# EAGLE board Placa brd actualizada eze; (EAGLE 7.6.0)
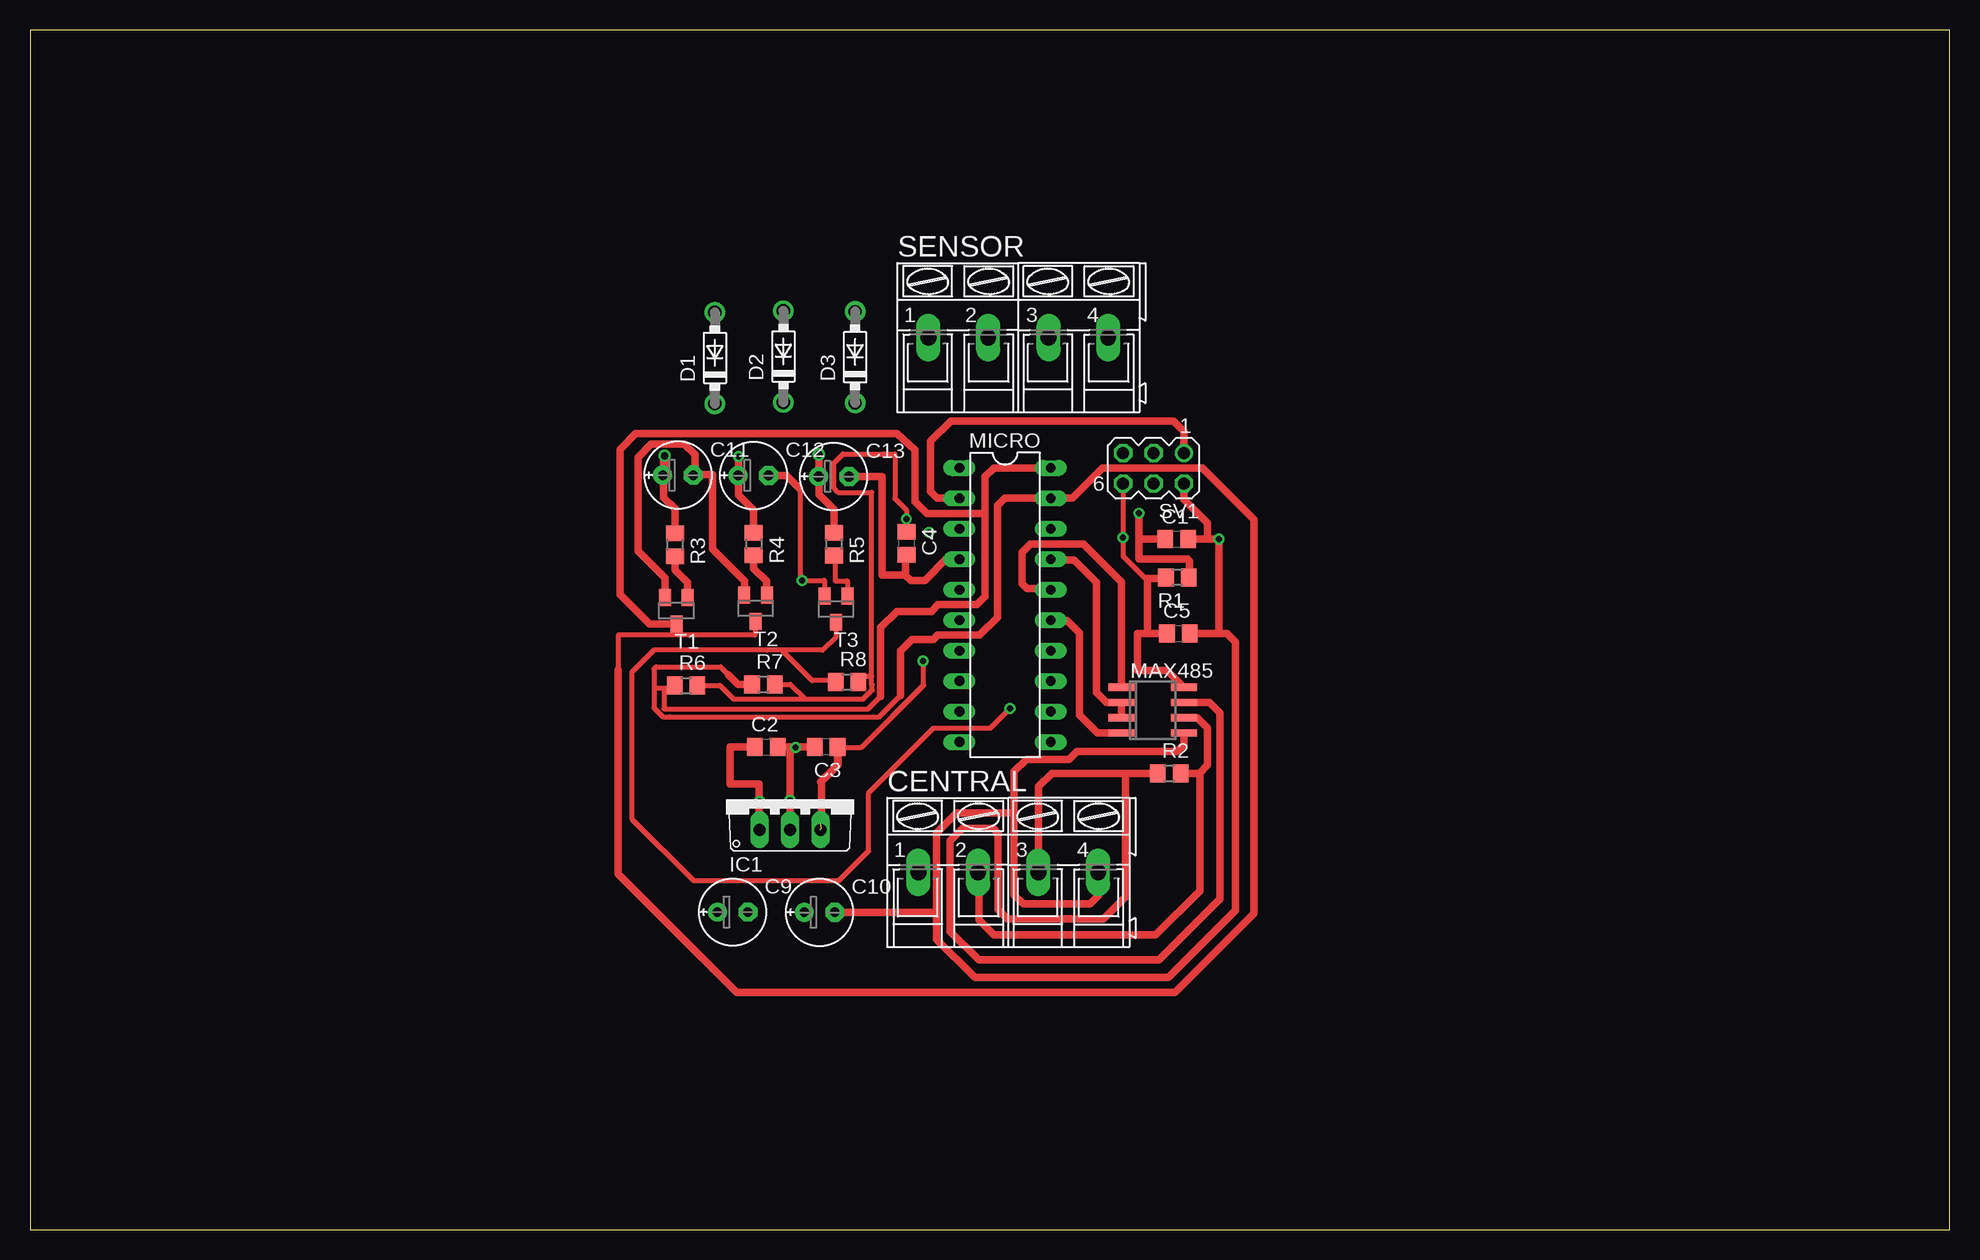
[diagram p0: board, top side]
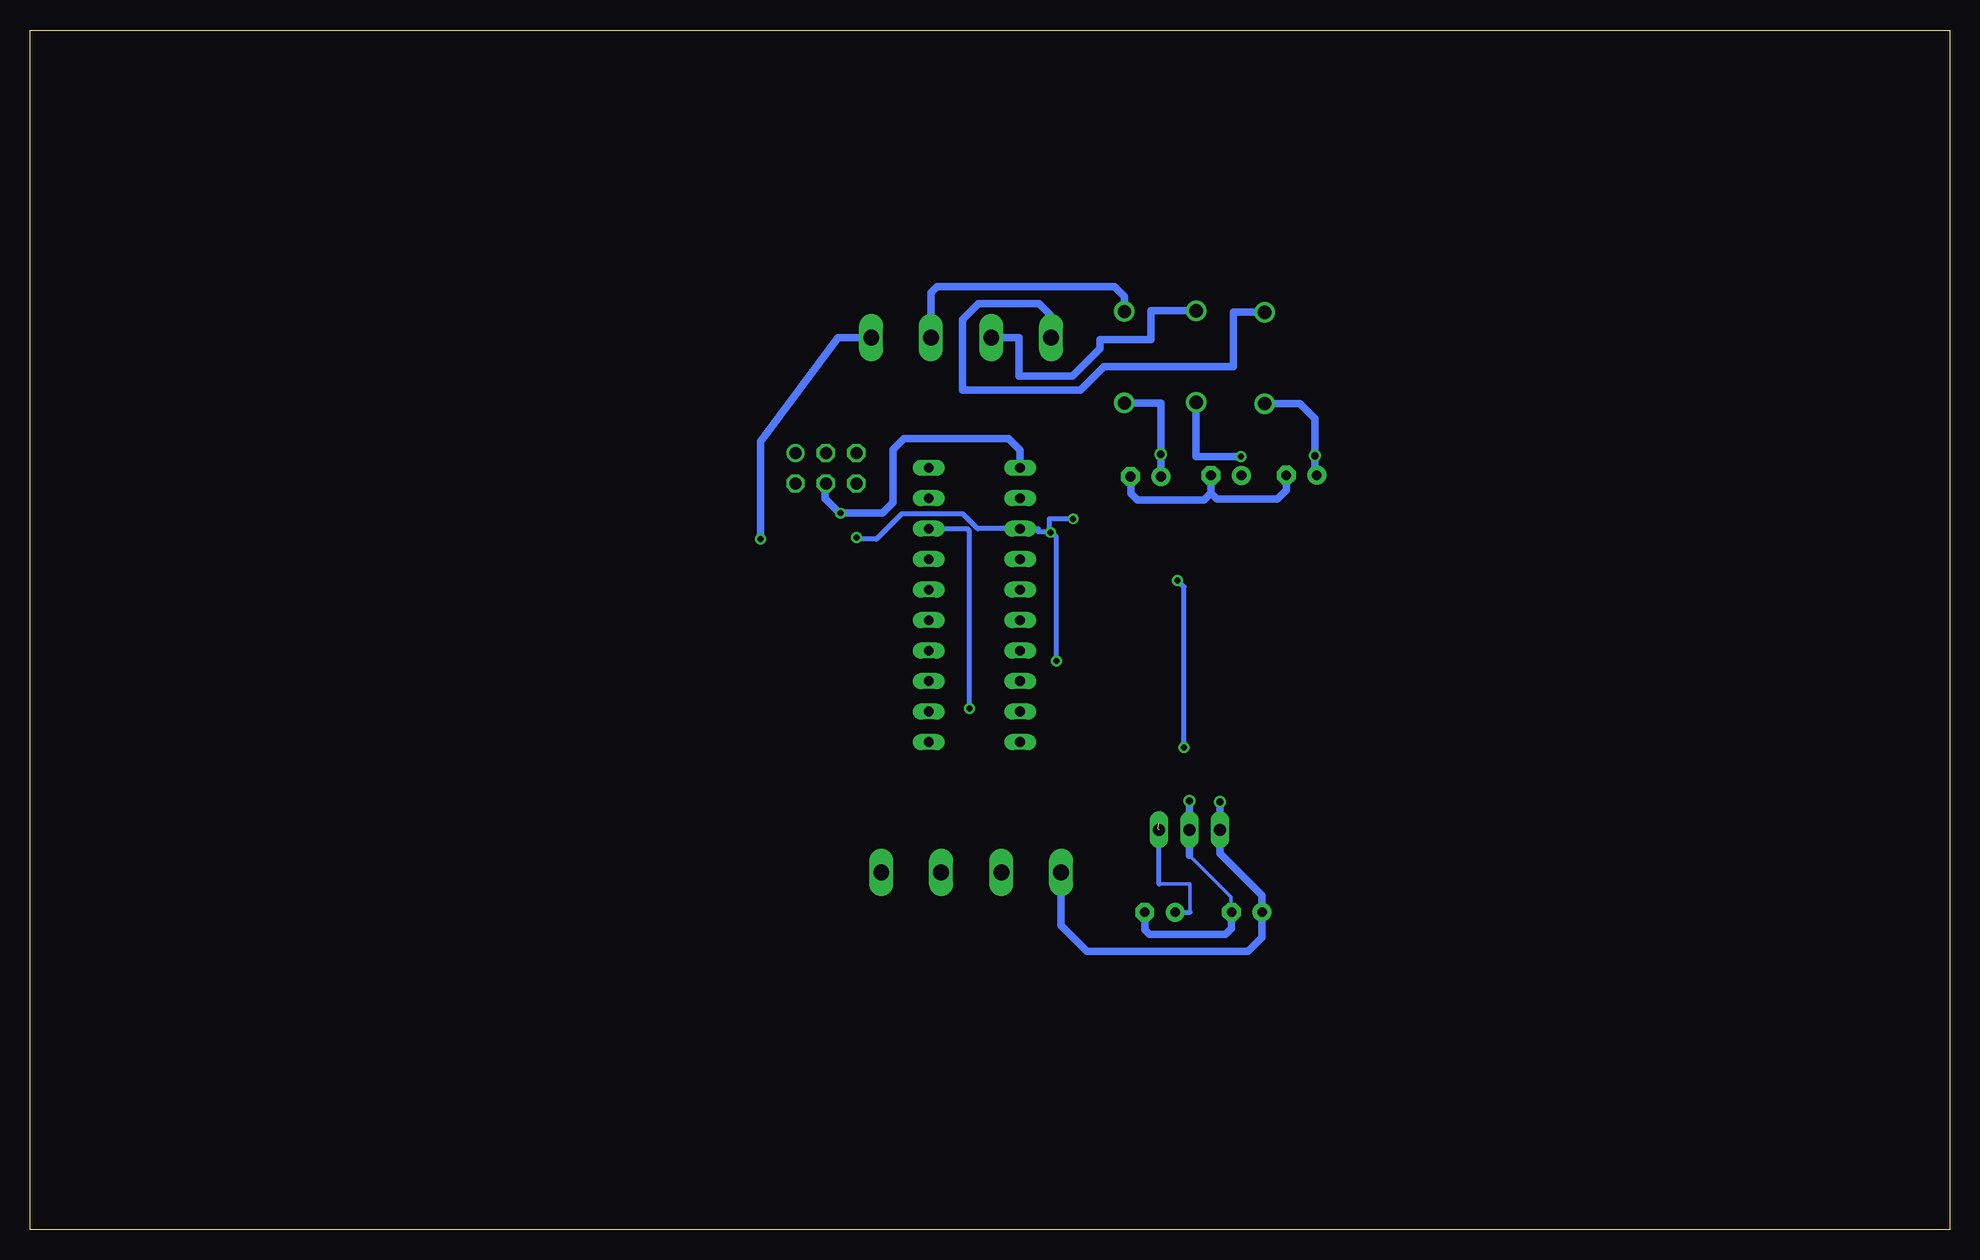
[diagram p1: board, bottom side, seen from below]

Size 160 x 100 mm. Coordinates in mm from the lower left corner, seen from the top.
Outline: 0,0 160,0 160,100 0,100 0,0
Copper layers (1*16): Top 0.035mm / dielectric 1.5mm / Bottom 0.035mm
Design rules "default": minimum track width 10mil, minimum drill 24mil, track to track 8mil, track to pad 8mil, pad to pad 8mil, via to via 8mil, smd to smd 8mil, copper to edge 40mil, drill to drill 8mil, minimum pad ring 10mil, minimum via ring 8mil, stop-mask expansion 4mil, vias tented up to drill 0mil, thermal gap 10mil

## Footprints (pad centres in the part's own frame; a part is rotated, then mirrored left to right if it is on the bottom)
C0805 = smd 1.3 x 1.5: 1 -0.95,0; 2 0.95,0
E2,5-6E = drill 0.813 pad 1.575: + -1.27,0 | drill 0.813 pad 1.575 octagon: - 1.27,0
AK300/4 = drill 1.321 long: 1 -7.493,0; 2 -2.515,0; 3 2.515,0; 4 7.493,0
DO41-7.6 = drill 1.1 pad 1.7: A 3.81,0; C -3.81,0
TO220V = drill 1.016 long: 1 -2.54,-2.54; 2 0,-2.54; 3 2.54,-2.54
SOIC8 = smd 0.6 x 2.2: 1 -1.905,-2.6; 2 -0.635,-2.6; 3 0.635,-2.6; 4 1.905,-2.6; 5 1.905,2.6; 6 0.635,2.6; 7 -0.635,2.6; 8 -1.905,2.6
DIL20 = drill 0.813 long: 1 -11.43,-3.81; 2 -8.89,-3.81; 3 -6.35,-3.81; 4 -3.81,-3.81; 5 -1.27,-3.81; 6 1.27,-3.81; 7 3.81,-3.81; 8 6.35,-3.81; 9 8.89,-3.81; 10 11.43,-3.81; 11 11.43,3.81; 12 8.89,3.81; 13 6.35,3.81; 14 3.81,3.81; 15 1.27,3.81; 16 -1.27,3.81; 17 -3.81,3.81; 18 -6.35,3.81; 19 -8.89,3.81; 20 -11.43,3.81
R0805 = smd 1.3 x 1.5: 1 -0.95,0; 2 0.95,0
MA03-2 = drill 1.016: 1 -2.54,-1.27 | drill 1.016 octagon: 2 -2.54,1.27; 3 0,-1.27; 4 0,1.27; 5 2.54,-1.27; 6 2.54,1.27
SOT23 = smd 1 x 1.4: 1 -0.95,-1.1; 2 0.95,-1.1; 3 0,1.1

## Placement (x,y rotation side)
C1  100nF  [C0805]  95.58,57.55 0 top
C2  100nF  [C0805]  61.38,40.23 0 top
C3  100nF  [C0805]  66.36,40.23 180 top
C4  100n  [C0805]  73.05,57.2 270 top
C5  100n  [C0805]  95.72,49.7 0 top
C9  47uF x 25V  [E2,5-6E]  58.57,26.46 0 top
C10  47uF x 16V  [E2,5-6E]  65.81,26.45 0 top
C11  47uF x 16V  [E2,5-6E]  54.02,62.88 0 top
C12  47uF x 16V  [E2,5-6E]  60.3,62.87 0 top
C13  47uF x 16V  [E2,5-6E]  67,62.77 0 top
CENTRAL  [AK300/4]  81.55,29.77 0 top
D1  1N5819-B  [DO41-7.6]  57.09,72.66 90 top
D2  1N5819-B  [DO41-7.6]  62.8,72.78 90 top
D3  1N5819-B  [DO41-7.6]  68.78,72.72 90 top
IC1  LM2940  [TO220V]  63.35,35.87 0 top
MAX485  LTC485S  [SOIC8]  93.58,43.3 270 top
MICRO  [DIL20]  81.28,52.07 270 top
R1  4,7k-10k  [R0805]  95.64,54.35 180 top
R2  120  [R0805]  94.97,38.04 0 top
R3  100  [R0805]  53.75,57.08 270 top
R4  100  [R0805]  60.33,57.15 270 top
R5  100  [R0805]  67,57.14 270 top
R6  4k7  [R0805]  54.69,45.36 0 top
R7  4k7  [R0805]  61.13,45.45 0 top
R8  4k7  [R0805]  68.1,45.66 0 top
SENSOR  [AK300/4]  82.39,74.36 0 top
SV1  [MA03-2]  93.66,63.47 180 top
T1  BC846  [SOT23]  53.88,51.59 180 top
T2  BC846  [SOT23]  60.48,51.79 180 top
T3  BC846  [SOT23]  67.17,51.72 180 top

## Library data of the parts
C1-C5 R1-R8 = resistor
C9-C13 = rcl
CENTRAL SENSOR = con-ptr500; OC_FARNELL: unknown; OC_NEWARK: unknown
D1-D3 = diode
IC1 = linear
MAX485 = linear-technology; OC_FARNELL: unknown; OC_NEWARK: unknown
MICRO = ic-package
SV1 = con-lstb; OC_FARNELL: unknown; OC_NEWARK: unknown
T1-T3 = transistor

## Nets
BKGD: MICRO.2 SV1.1
CONTROL485: MAX485.2 MAX485.3 MICRO.17
GND: C1.2 C2.2 C3.2 C4.2 C5.2 C9.- C10.- C11.- C12.- C13.- CENTRAL.4 IC1.2 MAX485.5 MICRO.4 SENSOR.4 SV1.2 T1.2 T2.2 T3.2
N$1: C2.1 C9.+ CENTRAL.1 IC1.1
N$2: CENTRAL.2 MAX485.6 R2.2
N$3: CENTRAL.3 MAX485.7 R2.1
N$4: D1.A SENSOR.1
N$5: D2.A SENSOR.2
N$6: D3.A SENSOR.3
N$7: C11.+ D1.C R3.1
N$8: C12.+ D2.C R4.1
N$9: C13.+ D3.C R5.1
N$10: R5.2 T3.1
N$12: R4.2 T2.1
N$14: R3.2 T1.1
RST: C1.1 MICRO.1 R1.1 SV1.4
RXD: MAX485.1 MICRO.16
SENSOR1: MICRO.20 R6.1 T1.3
SENSOR2: MICRO.19 R7.1 T2.3
SENSOR3: MICRO.18 R8.1 T3.3
TXD: MAX485.4 MICRO.15
VCC: C3.1 C4.1 C5.1 C10.+ IC1.3 MAX485.8 MICRO.3 R1.2 R6.2 R7.2 R8.2 SV1.6

## Tracks (layer width: path | path; a pad name or v marks a point on that pad's centre or on a via)
BKGD
  Top 0.61: MICRO.2 75.61,60.96 75.06,61.51 75.06,65.72 76.75,67.41 95.3,67.41 96.19,66.52 96.19,64.75 SV1.1
CONTROL485
  Top 0.61: MAX485.3 MAX485.2 89.72,43.94 88.89,44.76 88.89,53.95 87.03,55.81 85.16,55.81 MICRO.17
GND  (via drill 0.5)
  Top 0.406: 64.13,61.78 64.17,61.78 64.17,54.12 v64.35,54.12 66.22,54.12 T3.2 | C3.2 63.83,40.23 v63.8,40.2
  Top 0.61: MAX485.5 96.19,40.44 95.59,39.85 87.27,39.85 86.61,39.19 83.05,39.19 82.03,38.17 82.03,34.83 | 82.03,34.83 82.03,27.91 82.81,27.14 88.34,27.14 89.05,27.86 89.05,29.76 CENTRAL.4 | C5.2 99.1,49.7 | 99.1,49.7 99.77,49.7 100.47,48.99 100.47,26.59 94.9,21.02 78.75,21.02 75.58,24.2 75.58,26.23 | 75.58,26.23 75.58,33.06 77.25,34.73 81.93,34.73 82.03,34.83 | C13.- 71,62.77 71,54.55 73,54.55 | 72.99,56.31 C4.2 73,56.2 73,54.55 | C10.- 75.36,26.45 75.58,26.23 | IC1.2 63.35,39.2 63.35,40.23 | 64.13,61.78 63.07,62.84 61.59,62.84 C12.- | MICRO.4 76.37,55.88 74.61,54.12 73.42,54.12 73,54.54 73,54.55 | C3.2 63.35,40.23 | 63.35,40.23 C2.2 | T2.2 59.55,52.91 59.55,54.05 56.89,56.71 56.89,62.92 55.33,62.92 C11.- 55.42,63.02 55.42,64.59 54.53,65.48 51.79,65.48 50.67,64.36 50.67,56.58 52.95,54.3 52.95,52.72 T1.2 | C1.2 98.35,57.55 | 99.1,49.7 v99.1,57.55 98.35,57.55 | SV1.2 96.19,60.85 98.15,58.9 98.15,57.76 98.35,57.55
  Bottom 0.305: 59.88,26.5 59.88,27.71 63.35,31.18
  Bottom 0.406: v63.8,40.2 63.8,53.56 v64.35,54.12
  Bottom 0.61: C11.- 55.28,61.66 56.03,60.91 61.05,60.91 61.55,61.4 61.55,62.84 C12.- 61.57,61.4 62.16,60.81 67.67,60.81 68.23,61.37 68.23,62.74 C13.- | 63.31,33.28 IC1.2 63.35,35.77 63.35,31.18 | 59.88,26.51 59.89,26.5 | SENSOR.4 92.64,74.36 99.1,65.7 v99.1,57.55 | C10.- 67.08,24.98 66.7,24.6 60.35,24.6 59.85,25.1 C9.- 59.88,26.5 59.89,26.5 | 59.89,26.5 59.91,26.48
N$1
  Top 0.61: IC1.1 60.78,33.33 60.78,37.16 58.35,37.16 58.35,40.24 C2.1
  Bottom 0.61: 60.77,33.28 IC1.1 60.81,35.8 60.8,35.78 60.8,31.34 57.3,27.84 C9.+ 57.31,26.45 57.31,24.35 58.46,23.2 71.92,23.2 74.05,25.34 CENTRAL.1
N$2
  Top 0.61: R2.2 97.49,38.04 | 97.49,38.04 98.16,38.71 98.16,41.8 97.33,42.63 96.22,42.63 MAX485.6 | CENTRAL.2 79.08,29.71 79.08,25.82 80.36,24.55 93.8,24.55 97.5,28.25 97.5,38.03 97.49,38.04
N$3
  Top 0.61: R2.1 91.46,38.04 | 91.46,38.04 85.18,38.04 84.06,36.92 CENTRAL.3 | MAX485.7 98.33,43.94 99.2,43.06 99.2,27.55 94.12,22.46 79.09,22.46 76.7,24.86 76.7,32.38 77.74,33.42 80.31,33.42 80.7,33.03 80.7,26.68 81.48,25.91 89.48,25.91 91.32,27.74 91.32,37.9 91.46,38.04
N$4
  Bottom 0.61: D1.A 59.7,76.47 59.7,71.95 70.47,71.95 72.42,70 | 72.42,70 82.28,70 82.28,75.84 80.94,77.19 75.89,77.19 74.92,76.22 74.92,74.38 SENSOR.1 | 72.42,70
N$5
  Bottom 0.61: D2.A 66.55,76.58 66.55,74.2 70.81,74.2 70.81,73.44 73.09,71.17 75.39,71.17 75.4,71.15 77.55,71.15 77.55,74.36 SENSOR.2
N$6
  Bottom 0.61: D3.A 68.78,77.78 69.59,78.59 84.4,78.59 84.91,78.08 SENSOR.3
N$7
  Top 0.61: R3.1 53.75,60.1 52.82,61.03 52.82,64.64 52.91,64.72 52.91,63.04 C11.+ 52.77,62.85
  Bottom 0.61: 52.77,62.85 C11.+ 52.91,63.04 52.91,67.6 54.15,68.84 D1.C
N$8  (via drill 0.5)
  Top 0.305: C12.+ 59.03,64.43 v59.05,64.45
  Top 0.61: R4.1 60.33,59.97 59.05,61.25 v59.05,64.45
  Bottom 0.61: v59.05,64.45 62.8,64.45 D2.C
N$9
  Top 0.61: R5.1 67,60.02 65.75,61.27 65.75,64.67 65.79,64.7 65.79,62.84 C13.+ 65.75,62.74
  Bottom 0.61: C13.+ 65.73,68.91 D3.C
N$10
  Top 0.406: R5.2 67.11,56.19 67.11,54.07 68.12,54.07 T3.1
N$11  (via drill 0.6)
  other vias: 65.75,64.62
N$12
  Top 0.61: R4.2 60.33,55.12 61.38,54.06 61.38,52.94 T2.1
N$14
  Top 0.61: R3.2 53.75,54.99 54.82,53.92 T1.1
N$15  (via drill 0.6)
  other vias: 52.88,64.5
N$16  (via drill 0.6)
  other vias: 60.82,35.65
N$17  (via drill 0.6)
  other vias: 63.36,35.74
N$19  (via drill 0.5)
  other vias: 74.94,58.12
RST  (via drill 0.5)
  Top 0.61: R1.1 96.63,54.4 96.63,55.73 96.47,55.89 92.45,55.89 92.45,57.7 | 92.45,57.7 v92.45,59.71 | C1.1 92.59,57.55 92.45,57.7
  Bottom 0.61: MICRO.1 77.47,64.98 78.44,65.95 87.16,65.95 88.08,65.04 88.08,60.59 88.95,59.71 v92.45,59.71 92.52,59.71 93.75,60.95 93.75,62.1 SV1.4
RXD
  Top 0.61: MAX485.1 90.98,53.99 87.81,57.16 83.38,57.16 82.67,56.45 82.67,53.87 83.11,53.42 85,53.42 MICRO.16
SENSOR1
  Top 0.406: 52.85,45.15 53.52,45.15 R6.1 | 70.9,44.45 69.88,43.43 69.88,43.4 52.85,43.4 52.85,45.15 | 52.05,45.15 52.85,45.15
  Top 0.61: MICRO.20 80.36,63.5 79.62,62.76 79.62,59.69 | 79.62,59.69 79.62,52.76 78.94,52.09 75.69,52.09 75.14,51.53 72.27,51.53 70.9,50.17 70.9,44.45 | 53.77,45.33 R6.1 | T1.3 51.63,50.49 49.17,52.95 49.17,65.03 50.49,66.36 72.26,66.36 73.79,64.97 73.79,60.67 74.76,59.7 79.6,59.7 79.62,59.69
SENSOR2
  Top 0.406: 49.03,46.66 49.03,49.55 60.4,49.55 60.48,49.67 T2.3 | 72.56,44.52 70.78,42.75 53.35,42.75 52.8,42.75 52.75,42.75 52,43.5 52,46.72 52.19,46.91 57.58,46.91 58.24,46.24
  Top 0.61: 72.56,44.52 72.56,48.25 73.51,49.2 75.31,49.2 75.64,49.55 79.16,49.55 80.64,51.02 80.64,60.34 81.25,60.96 MICRO.19 85.11,60.98 86.9,60.98 89.42,63.49 97.73,63.49 102.02,59.2 102.02,26.38 95.42,19.78 58.91,19.78 49.03,29.66 49.03,46.66 | 60.24,45.51 R7.1 59.03,45.45 58.24,46.24
SENSOR3  (via drill 0.5)
  Top 0.406: 67.25,45.76 65.19,45.76 62.65,48.3 | 62.65,48.3 61.45,48.3 52,48.3 50.15,46.45 50.15,34.25 55.3,29.1 67.45,29.1 69.9,31.55 69.9,36.4 75.3,41.8 80.05,41.8 v81.7,43.45 | T3.3 67.17,49.38 66.1,48.3 62.65,48.3
  Top 0.61: 67.25,45.76 R8.1
  Bottom 0.406: v81.7,43.45 81.7,58.25 81.85,58.4 85.09,58.4 MICRO.18
TXD
  Top 0.61: MAX485.4 89,41.4 87.5,42.9 87.5,49.71 86.44,50.77 85.12,50.77 MICRO.15
VCC  (via drill 0.5)  (2 unrouted)
  Top 0.406: 67.34,40.2 69.3,40.2 | 69.3,40.2 74.42,45.32 | R6.2 57.51,45.36 58.66,44.21 64.63,44.21 | 64.63,44.21 69.44,44.21 70.19,44.97 70.19,45.42 70.15,45.42 70.15,46.12 | 69.28,45.42 R8.2 69.05,46.12 70.15,46.12 | R7.2 63.38,45.45 64.63,44.21 | 69.3,40.2 74.48,45.38 74.48,47.36 v74.45,47.4 | SV1.6 v91.11,57.7 91.11,56.13 92.9,54.35 R1.2 | 70.15,46.12 70.15,61.45 67.36,61.45 67,61.8 67,63.89 67,63.9 67,63.91 67.75,64.65 71.17,64.65 71.17,64.66 72.08,64.66 72.08,60.92 73.05,59.96 v73.05,59.25 C4.1
  Top 0.61: MAX485.8 94.77,46.62 92.3,46.62 92.3,49.7 93.15,49.7 | R1.2 94.77,54.27 93.15,54.27 93.15,49.7 | 65.89,37.3 67.34,38.74 67.34,40.2 C3.1 67.31,38.84 67.37,38.78 65.96,37.37 65.96,33.45 65.89,33.38 | 93.15,49.7 C5.1
  Bottom 0.305: 63.3,26.45 63.3,28.8 65.89,28.8
  Bottom 0.406: v74.45,47.4 74.45,57.73 74.88,58.16 75.05,58.16 | C10.+ 63.3,26.45 | 65.89,28.8 IC1.3 | v91.11,57.7 90.97,57.55 89.45,57.55 87.35,59.65 82.25,59.65 81.02,58.42 MICRO.3 75.97,58.42 75.95,58.4 75.95,58.16 75.05,58.16 | v73.05,59.25 75.05,59.25 75.05,58.16
  Bottom 0.61: 65.96,33.92 65.89,33.86